# Altium PCB HUB_1P4.pcbdoc (part 1 of 2)
Units mil, origin at the board's own origin, x right, y up, seen from the top; angles counter-clockwise.
Board outline 4467.48 x 3480.02 mil, 2 copper layers (Top Layer, Bottom Layer); 207 components, 150 nets, 727 pads, 383 vias.
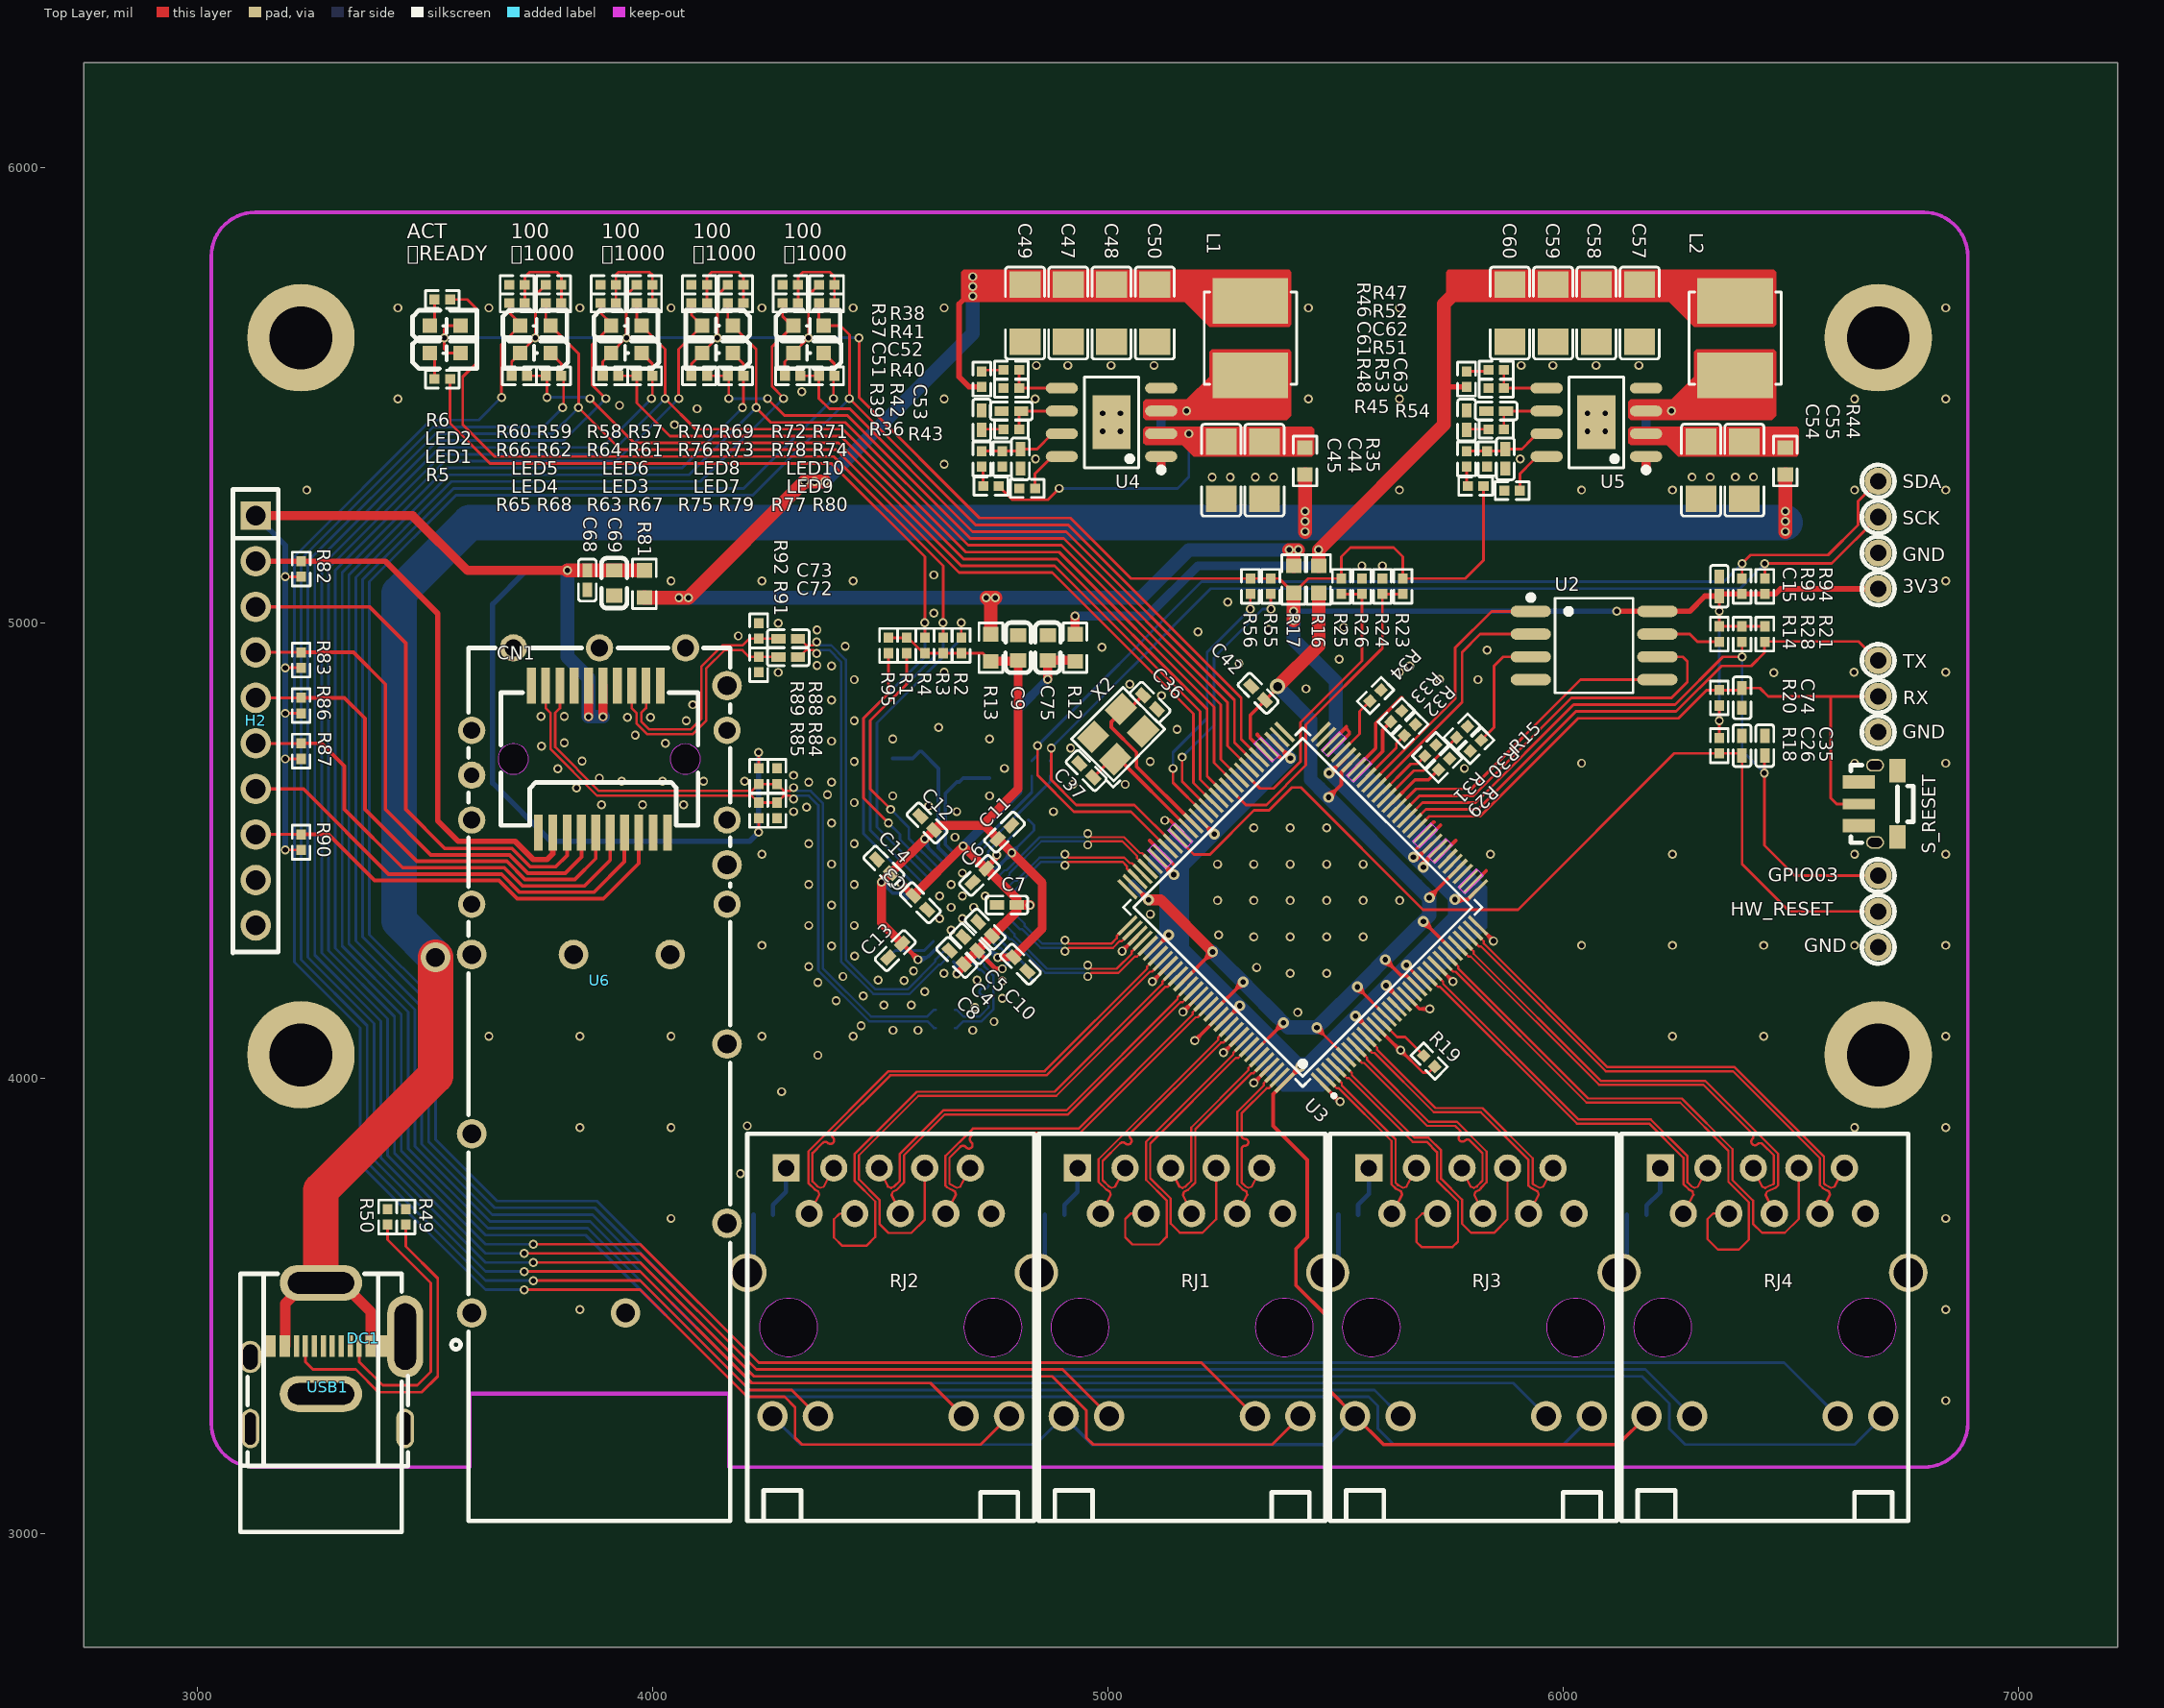
[diagram p0: Top Layer view]
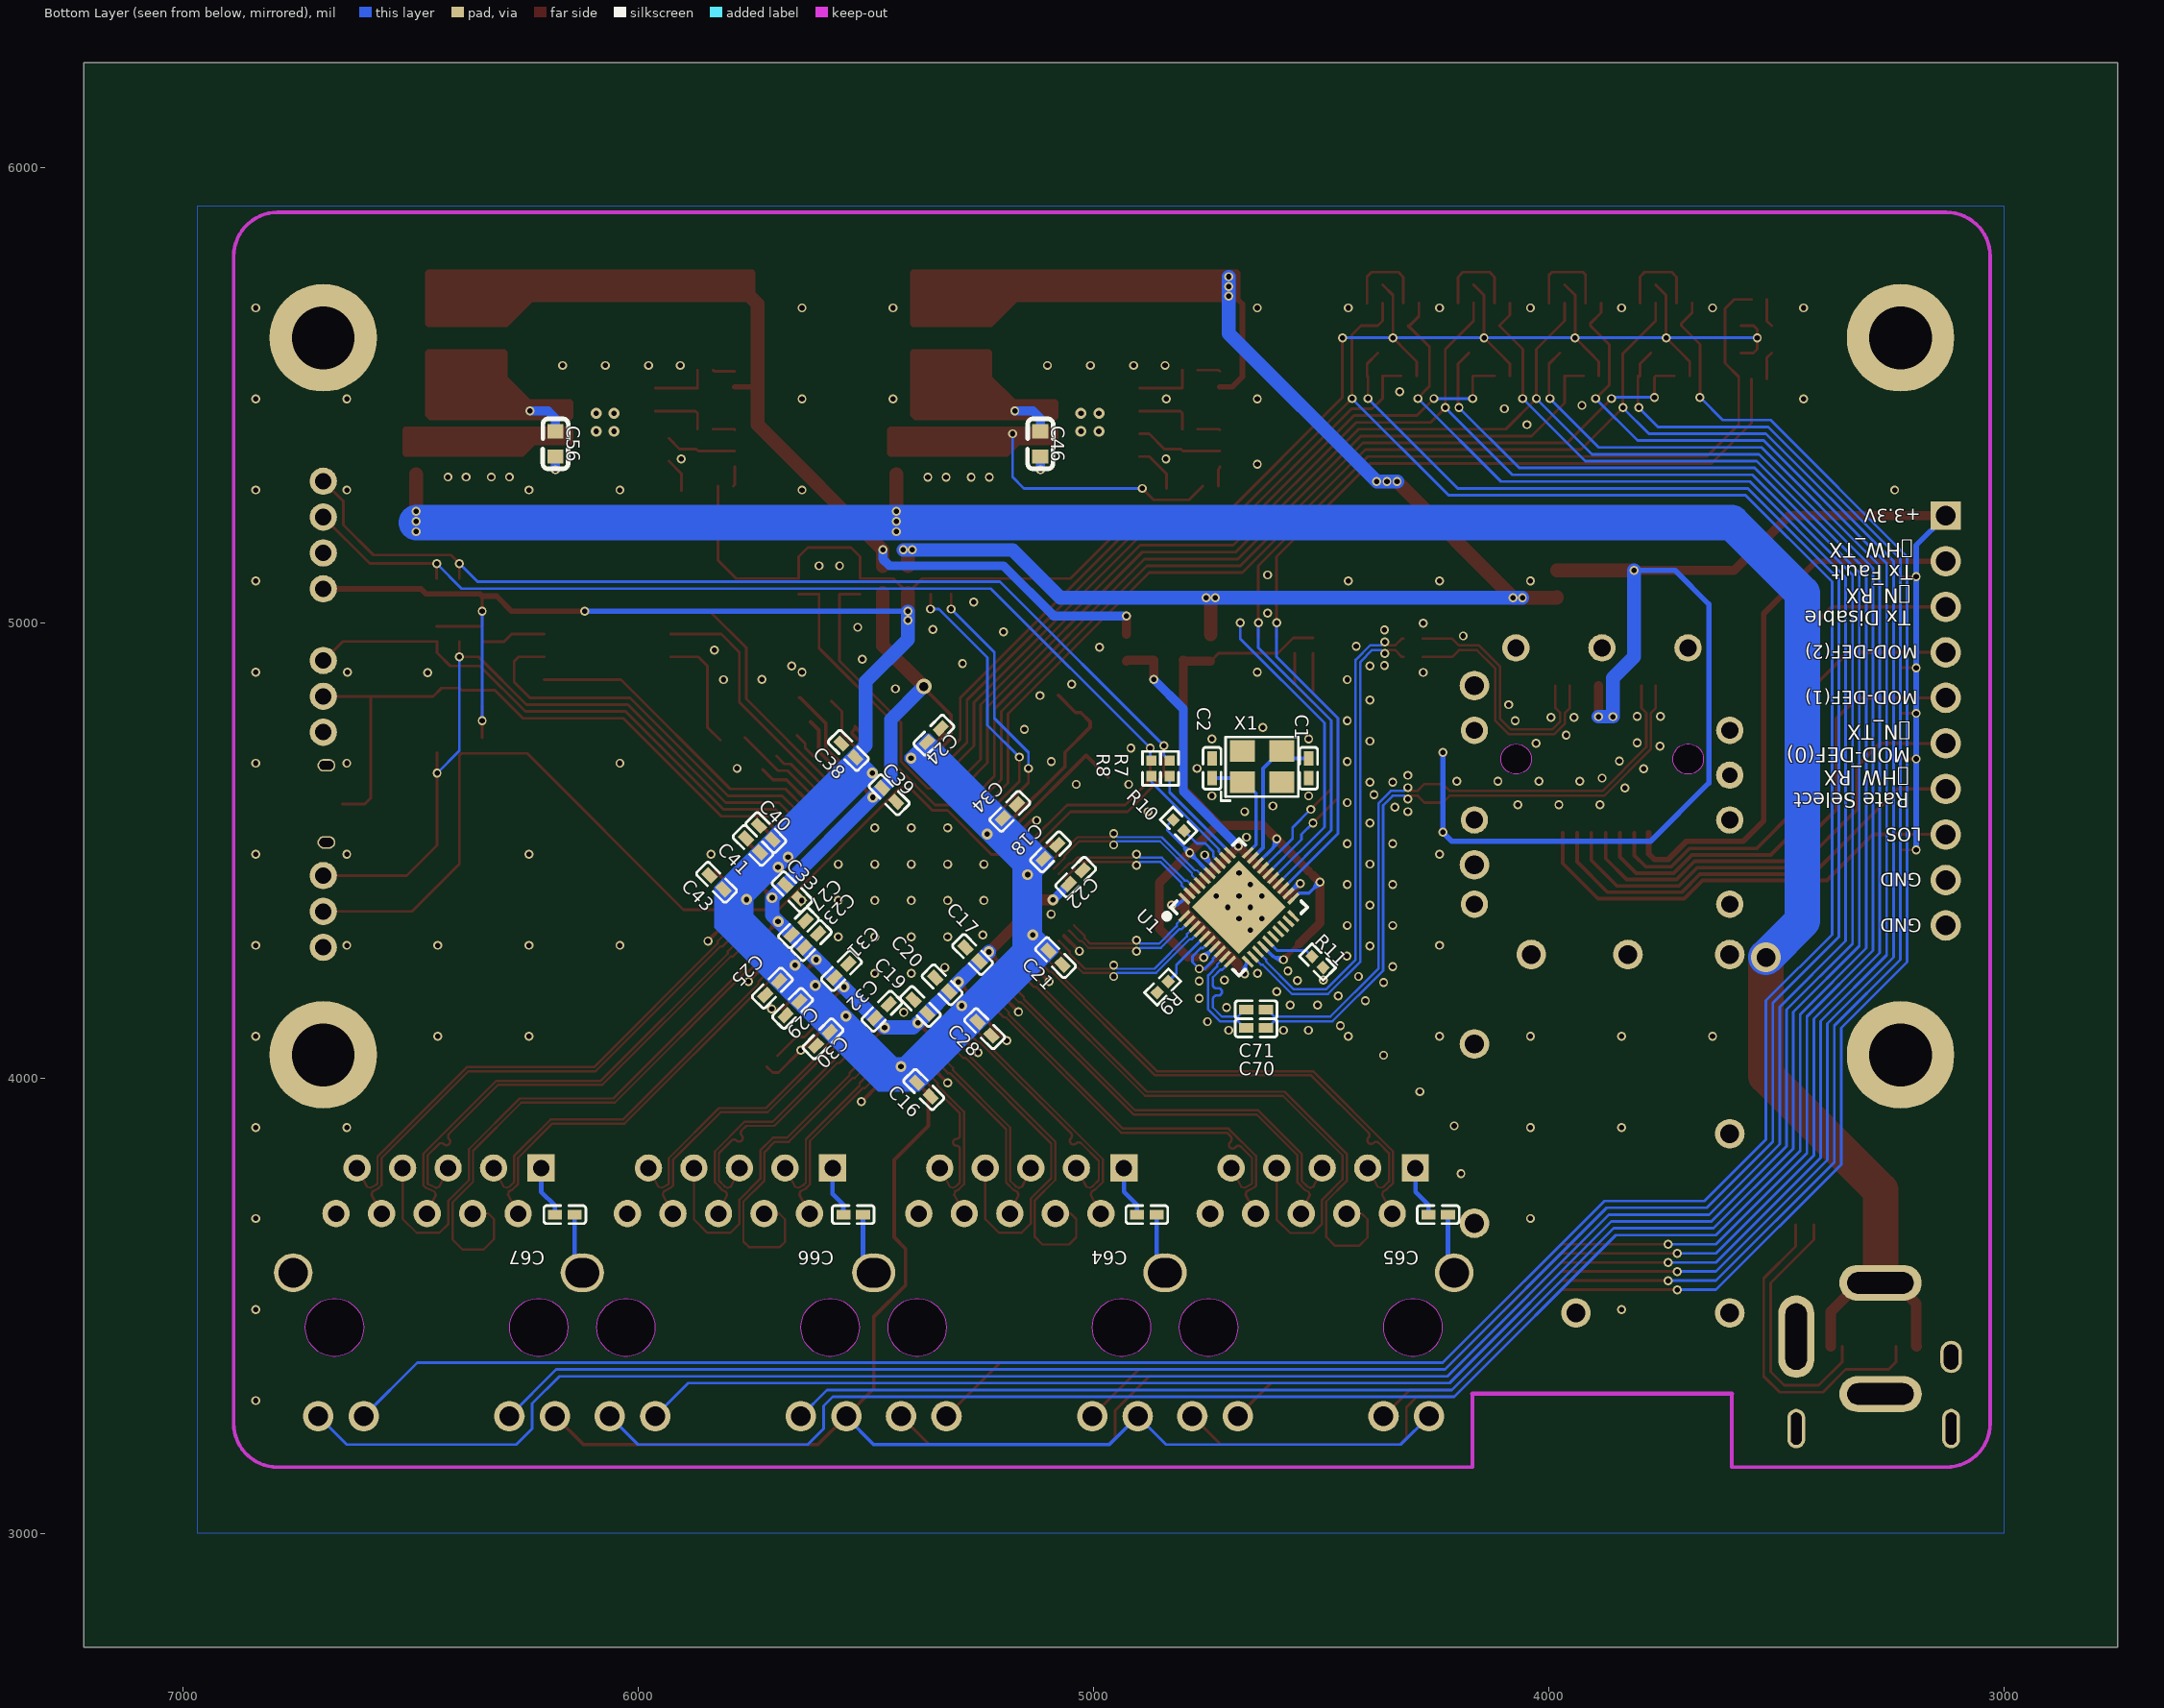
[diagram p1: Bottom Layer view, seen from below]

## Layer stack, top to bottom
Top Layer: signal copper (thickness not stored)
Dielectric: dielectric 12.6, FR-4, Dk 4.8
Bottom Layer: signal copper (thickness not stored)

## Board outline
7217.48,2750 2750,2750 2750,6230.02 7217.48,6230.02

## Components (designator, comment, footprint, x,y, rotation, side; value= is the part's Value field where it differs from the comment)
3V3 "测试点" TP-1.5MM 6691.42,5074.55 r0 top
C1 "0402CG180J500NT" C0402 4527.05,4680.3 r270 bottom
C2 "0402CG180J500NT" C0402 4739.19,4680.3 r270 bottom
C3 "CL05B104KO5NNNC" C0402_NEW 4587.44,4385.02 r135 top
C4 "CL05B104KO5NNNC" C0402_NEW 4697.44,4295.02 r315 top
C5 "CL05B104KO5NNNC" C0402_NEW 4729.8,4327.37 r315 top
C6 "CL05B104KO5NNNC" C0402_NEW 4717.44,4445.02 r45 top
C7 "CL05B104KO5NNNC" C0402_NEW 4777.44,4380.02 r0 top
C8 "CL05B104KO5NNNC" C0402_NEW 4667.44,4265.02 r315 top
C9 "CL10A106MA8NRNC" C0603 4802.44,4945.02 r270 top
C10 "CL05B104KO5NNNC" C0402_NEW 4807.44,4250.02 r135 top
C11 "CL05B104KO5NNNC" C0402_NEW 4772.44,4540.02 r225 top
C12 "CL05B104KO5NNNC" C0402_NEW 4602.44,4560.02 r315 top
C13 "CL05B104KO5NNNC" C0402_NEW 4532.44,4280.02 r45 top
C14 "CL05B104KO5NNNC" C0402_NEW 4507.44,4465.02 r315 top
C15 "CL05B104KO5NNNC" C0402_NEW 6342.44,5080.02 r270 top
C16 "CL05B104KO5NNNC" C0402_NEW 5372.46,3974.83 r225 bottom
C17 "CL05B104KO5NNNC" C0402_NEW 5265.32,4271.49 r45 bottom
C18 "CL05B104KO5NNNC" C0402_NEW 5094.11,4496.83 r135 bottom
C19 "CL05B104KO5NNNC" C0402_NEW 5379.79,4157.02 r45 bottom
C20 "CL05B104KO5NNNC" C0402_NEW 5331.9,4204.91 r45 bottom
C21 "CL05B104KO5NNNC" C0402_NEW 5082.94,4264.39 r225 bottom
C22 "CL05B104KO5NNNC" C0402_NEW 5038.63,4441 r315 bottom
C23 "CL05B104KO5NNNC" C0402_NEW 5619.44,4302.02 r315 bottom
C24 "CL05B104KO5NNNC" C0402_NEW 5350.22,4752.98 r315 bottom
C25 "CL05B104KO5NNNC" C0402_NEW 5705.17,4197.56 r135 bottom
C26 "CL05B104KO5NNNC" C0402_NEW 6392.44,4730.02 r270 top
C27 "CL05B104KO5NNNC" C0402_NEW 5647.44,4330.02 r315 bottom
C28 "CL05B104KO5NNNC" C0402_NEW 5238.85,4108.47 r225 bottom
C29 "CL05B104KO5NNNC" C0402_NEW 5660.66,4153.02 r135 bottom
C30 "CL05B104KO5NNNC" C0402_NEW 5593.83,4086.19 r135 bottom
C31 "CL05B104KO5NNNC" C0402_NEW 5553.26,4235.83 r315 bottom
C32 "CL05B104KO5NNNC" C0402_NEW 5464.33,4146.91 r315 bottom
C33 "CL05B104KO5NNNC" C0402_NEW 5661.44,4409.02 r225 bottom
C34 "CL05B104KO5NNNC" C0402_NEW 5183.2,4585.92 r135 bottom
C35 "CL05B104KO5NNNC" C0402_NEW 6442.44,4730.02 r270 top
C36 "0402CG200J500NT" C0402 5092.06,4825.41 r315 top
C37 "0402CG200J500NT" C0402 4952.06,4675.41 r315 top
C38 "CL05B104KO5NNNC" C0402_NEW 5538.11,4719.56 r225 bottom
C39 "CL05B104KO5NNNC" C0402_NEW 5448.44,4622.02 r45 bottom
C40 "CL05B104KO5NNNC" C0402_NEW 5719.44,4539.02 r225 bottom
C41 "CL05B104KO5NNNC" C0402_NEW 5747.44,4511.02 r225 bottom
C42 "CL05B104KO5NNNC" C0402_NEW 5329.44,4845.02 r315 top
C43 "CL05B104KO5NNNC" C0402_NEW 5827.66,4429.99 r225 bottom
C44 "CL31A476MPHNNNE" C1206 5343.4,5334.97 r90 top
C45 "CL31A476MPHNNNE" C1206 5248.4,5334.97 r90 top
C46 "CC0603KRX7R9BB104" C0603 5116.44,5392.58 r270 bottom
C47 "CL31A476MPHNNNE" C1206 4912.44,5680.02 r270 top
C48 "CL31A476MPHNNNE" C1206 5007.44,5679.97 r270 top
C49 "CL31A476MPHNNNE" C1206 4817.44,5680.02 r270 top
C50 "CL31A476MPHNNNE" C1206 5102.44,5680.02 r270 top
C51 "CL05B332KB5NNNC" C0402 4722.44,5445.02 r270 top
C52 "CL05C680JB5NNNC" C0402 4787.44,5465.02 r0 top
C53 "CL05B104KO5NNNC" C0402_NEW 4807.44,5360.02 r90 top
C54 "CL31A476MPHNNNE" C1206 6302.44,5335.02 r90 top
C55 "CL31A476MPHNNNE" C1206 6397.44,5335.02 r90 top
C56 "CC0603KRX7R9BB104" C0603 6181.44,5392.58 r270 bottom
C57 "CL31A476MPHNNNE" C1206 6167.44,5680.02 r270 top
C58 "CL31A476MPHNNNE" C1206 6072.44,5680.02 r270 top
C59 "CL31A476MPHNNNE" C1206 5977.44,5680.02 r270 top
C60 "CL31A476MPHNNNE" C1206 5882.44,5680.02 r270 top
C61 "0402B102K500NT" C0402 5787.44,5445.02 r270 top
C62 "0402B151K500NT" C0402 5852.44,5465.02 r0 top
C63 "CL05B104KO5NNNC" C0402_NEW 5872.44,5360.02 r90 top
C64 "CL05B104KB54PNC" C0402 4882.44,3700.02 r0 bottom
C65 "CL05B104KB54PNC" C0402 4242.44,3700.02 r0 bottom
C66 "CL05B104KB54PNC" C0402 5527.44,3700.02 r0 bottom
C67 "CL05B104KB54PNC" C0402 6160.94,3700.02 r0 bottom
C68 "CL05B104KO5NNNC" C0402_NEW 3856.07,5093.56 r90 top
C69 "CL10A105KB8NNNC" C0603 3915.21,5087.46 r90 top
C70 "CL05B104KO5NNNC" C0402_NEW 4642.44,4110.02 r0 bottom
C71 "CL05B104KO5NNNC" C0402_NEW 4642.44,4150.02 r0 bottom
C72 "CL05B104KO5NNNC" C0402_NEW 4297.44,4925.02 r0 top
C73 "CL05B104KO5NNNC" C0402_NEW 4297.44,4965.02 r0 top
C74 "CL05B104KO5NNNC" C0402_NEW 6392.44,4835.02 r90 top
C75 "CL10A106MA8NRNC" C0603 4867.44,4945.02 r270 top
CN1 "1367073-1" SFP-SMD_1367073-1 3882.48,4700.64 r0 top
DC1 "DC-005_2.5" DC-IN-TH_DC005 3363.48,3428.17 r90 top
GND "测试点" TP-1.5MM 6691.42,5153.29 r0 top
GND "测试点" TP-1.5MM 6691.42,4287.15 r0 top
GND "测试点" TP-1.5MM 6691.42,4759.59 r0 top
GPIO03 "测试点" TP-1.5MM 6691.42,4444.63 r0 top
H2 "HDR-F_2.54_1x10P" HDR-TH_10P-P2.54-V-F 3127.44,4785.02 r270 top
HW_RESET "测试点" TP-1.5MM 6691.42,4365.89 r0 top
L1 "VLS5045EX-220M" IND-SMD_L5.0-W5.0_LVS505040 5312.44,5625.02 r90 top
L2 "VLS5045EX-220M" IND-SMD_L5.0-W5.0_LVS505040 6377.44,5625.02 r90 top
LED1 "19-213/Y2C-CQ2R2L/3T(CY)" LED0603-R-RD 3543.78,5592.26 r0 top
LED2 "19-217/GHC-YR1S2/3T" LED0603-R-RD 3543.78,5652.26 r0 top
LED3 "19-213/Y2C-CQ2R2L/3T(CY)" LED0603-R-RD 3941.81,5592.26 r180 top
LED4 "19-213/Y2C-CQ2R2L/3T(CY)" LED0603-R-RD 3741.81,5592.26 r180 top
LED5 "19-217/GHC-YR1S2/3T" LED0603-R-RD 3741.81,5652.26 r0 top
LED6 "19-217/GHC-YR1S2/3T" LED0603-R-RD 3941.81,5652.26 r0 top
LED7 "19-213/Y2C-CQ2R2L/3T(CY)" LED0603-R-RD 4141.81,5592.26 r180 top
LED8 "19-217/GHC-YR1S2/3T" LED0603-R-RD 4141.81,5652.26 r180 top
LED9 "19-213/Y2C-CQ2R2L/3T(CY)" LED0603-R-RD 4341.81,5592.26 r180 top
LED10 "19-217/GHC-YR1S2/3T" LED0603-R-RD 4341.81,5652.26 r0 top
R1 "0402WGF4701TCE" R0402 4557.44,4950.02 r90 top
R2 "0402WGF4701TCE" R0402 4677.44,4950.02 r90 top
R3 "0402WGF4701TCE" R0402 4637.44,4950.02 r270 top
R4 "0402WGF4701TCE" R0402 4597.44,4950.02 r270 top
R5 "0402WGF4700TCE" R0402 3537.44,5535.02 r180 top
R6 "0402WGF4700TCE" R0402 3537.44,5710.02 r180 top
R7 "Res_0402" R0402 4832.44,4680.02 r90 bottom
R8 "Res_0402" R0402 4872.44,4680.02 r90 bottom
R9 "RC0402FR-072K49L" R0402 4847.44,4200.02 r135 bottom
R10 "0402WGF4701TCE" R0402 4812.44,4555.02 r45 bottom
R11 "0402WGF4701TCE" R0402 4507.44,4255.02 r45 bottom
R12 "0603WAF0000T5E" R0603 4927.44,4945.02 r270 top
R13 "0603WAF0000T5E" R0603 4742.44,4945.02 r270 top
R14 "0402WGF4701TCE" R0402 6342.44,4975.02 r90 top
R15 "0402WGF1001TCE" R0402 5807.44,4730.02 r45 top
R16 "0603WAF0000T5E" R0603 5462.44,5095.02 r270 top
R17 "0603WAF0000T5E" R0603 5407.44,5095.02 r270 top
R18 "0402WGF4701TCE" R0402 6342.44,4730.02 r90 top
R19 "RC0402FR-072K49L" R0402 5705.44,4037.02 r135 top
R20 "0402WGF4701TCE" R0402 6342.44,4835.02 r270 top
R21 "0402WGF4701TCE" R0402 6442.44,4975.02 r270 top
R23 "0402WGF4701TCE" R0402 5647.44,5080.02 r90 top
R24 "tr0402d10k0q1025z" R0402 5602.44,5080.02 r90 top
R25 "0402WGF4701TCE" R0402 5512.44,5080.02 r90 top
R26 "tr0402d10k0q1025z" R0402 5557.44,5080.02 r90 top
R28 "0402WGF4701TCE" R0402 6392.44,4975.02 r90 top
R29 "0402WGF1001TCE" R0402 5737.94,4689.39 r225 top
R30 "0402WGF1001TCE" R0402 5777.44,4760.02 r225 top
R31 "0402WGF1001TCE" R0402 5707.94,4719.39 r225 top
R32 "0402WGF1001TCE" R0402 5662.94,4764.39 r225 top
R33 "0402WGF1001TCE" R0402 5632.94,4794.39 r225 top
R34 "0402WGF1001TCE" R0402 5587.44,4840.02 r225 top
R35 "0603WAF0000T5E" R0603 5432.44,5355.02 r90 top
R36 "0402WGF1002TCE" R0402 4742.44,5300.02 r180 top
R37 "0402WGF2702TCE" R0402 4722.44,5535.02 r90 top
R38 "0402WGF1503TCE" R0402 4787.44,5555.02 r180 top
R39 "0402WGF1002TCE" R0402 4722.44,5360.02 r270 top
R40 "0402WGF1002TCE" R0402 4787.44,5425.02 r0 top
R41 "0402WGF5602TCE" R0402 4787.44,5515.02 r0 top
R42 "0402WGF1002TCE" R0402 4767.44,5360.02 r90 top
R43 "0402WGF1003TCE" R0402 4822.44,5295.02 r180 top
R44 "0603WAF0000T5E" R0603 6487.44,5355.02 r90 top
R45 "0402WGF0000TCE" R0402 5807.44,5300.02 r180 top
R46 "0402WGF3302TCE" R0402 5787.44,5535.02 r90 top
R47 "0402WGF5101TCE" R0402 5852.44,5555.02 r180 top
R48 "0402WGF220JTCE" R0402 5787.44,5360.02 r270 top
R49 "0402WGF5101TCE" R0402 3457.44,3695.02 r270 top
R50 "0402WGF5101TCE" R0402 3417.44,3695.02 r270 top
R51 "0402WGF1002TCE" R0402 5852.44,5425.02 r0 top
R52 "0402WGF1003TCE" R0402 5852.44,5515.02 r0 top
R53 "0402WGF1002TCE" R0402 5832.44,5360.02 r90 top
R54 "0402WGF1503TCE" R0402 5887.44,5290.02 r180 top
R55 "0402WGF4701TCE" R0402 5357.44,5080.02 r270 top
R56 "0402WGF4701TCE" R0402 5312.44,5080.02 r270 top
R57 "0402WGF0000TCE" R0402 3981.81,5742.26 r0 top
R58 "0402WGF0000TCE" R0402 3901.81,5742.26 r0 top
R59 "0402WGF0000TCE" R0402 3781.81,5742.26 r0 top
R60 "0402WGF0000TCE" R0402 3701.81,5742.26 r0 top
R61 "0402WGF4701TCE" R0402 3981.81,5702.26 r180 top
R62 "0402WGF4701TCE" R0402 3781.81,5702.26 r180 top
R63 "0402WGF4701TCE" R0402 3906.81,5542.26 r0 top
R64 "0402WGF4700TCE" R0402 3901.81,5702.26 r180 top
R65 "0402WGF4701TCE" R0402 3706.81,5542.26 r0 top
R66 "0402WGF4700TCE" R0402 3701.81,5702.26 r180 top
R67 "0402WGF4700TCE" R0402 3981.81,5542.26 r180 top
R68 "0402WGF4700TCE" R0402 3781.81,5542.26 r180 top
R69 "0402WGF0000TCE" R0402 4181.81,5742.26 r0 top
R70 "0402WGF0000TCE" R0402 4101.81,5742.26 r0 top
R71 "0402WGF0000TCE" R0402 4381.81,5742.26 r0 top
R72 "0402WGF0000TCE" R0402 4301.81,5742.26 r0 top
R73 "0402WGF4701TCE" R0402 4181.81,5702.26 r180 top
R74 "0402WGF4701TCE" R0402 4381.81,5702.26 r180 top
R75 "0402WGF4701TCE" R0402 4101.81,5542.26 r0 top
R76 "0402WGF4700TCE" R0402 4101.81,5702.26 r180 top
R77 "0402WGF4701TCE" R0402 4306.81,5542.26 r0 top
R78 "0402WGF4700TCE" R0402 4301.81,5702.26 r180 top
R79 "0402WGF4700TCE" R0402 4181.81,5542.26 r180 top
R80 "0402WGF4700TCE" R0402 4381.81,5542.26 r180 top
R81 "0603WAF0000T5E" R0603 3981.38,5085.36 r90 top
R82 "0402WGF1002TCE" R0402 3227.44,5118.02 r270 top
R83 "0402WGF1002TCE" R0402 3227.4,4917.98 r270 top
R84 "Res_0402" R0402 4272.5,4587.91 r90 top
R85 "Res_0402" R0402 4232.5,4587.91 r270 top
R86 "0402WGF1002TCE" R0402 3227.4,4817.98 r270 top
R87 "0402WGF1002TCE" R0402 3227.4,4717.98 r270 top
R88 "Res_0402" R0402 4272.5,4662.91 r270 top
R89 "Res_0402" R0402 4232.5,4662.91 r90 top
R90 "0402WGF1002TCE" R0402 3227.4,4517.98 r270 top
R91 "Res_0402" R0402 4232.44,4908.02 r90 top
R92 "Res_0402" R0402 4232.44,4982.02 r270 top
R93 "0402WGF4701TCE" R0402 6392.44,5080.02 r270 top
R94 "0402WGF4701TCE" R0402 6442.44,5080.02 r270 top
R95 "0402WGF4701TCE" R0402 4517.44,4950.02 r90 top
RJ1 "hr911130a" rj45-th_hr911130a 5162.48,3530.02 r180 top
RJ2 "hr911130a" rj45-th_hr911130a 4522.48,3530.02 r180 top
RJ3 "hr911130a" rj45-th_hr911130a 5802.48,3530.02 r180 top
RJ4 "hr911130a" rj45-th_hr911130a 6442.48,3530.02 r180 top
RX "测试点" TP-1.5MM 6691.42,4838.33 r270 top
S_RESET "st-1133" key-smd_st-1133 6691.42,4602.11 r90 top
SCK "测试点" TP-1.5MM 6691.42,5232.03 r0 top
SDA "测试点" TP-1.5MM 6691.42,5310.77 r0 top
TX "测试点" TP-1.5MM 6691.42,4917.07 r90 top
U1 "RTL8213B-CG" QFN-40_L5.0-W5.0-P0.40-BL-EP3.7 4680,4375.02 r225 bottom
U2 "w25q32jvssiq" soic-8_l5.3-w5.3-p1.27-ls8.0-bl 6067.44,4950.02 r270 top
U3 "RTL8367S-CG" lqfp-128_l14.0-w14.0-p0.40-ls16.0-bl 5427.44,4375.02 r45 top
U4 "TPS54335ADDAR" SOP-8_L4.9-W3.9-P1.27-LS6.0-BL-EP-1 5007.44,5440.02 r90 top
U5 "TPS54335ADDAR" SOP-8_L4.9-W3.9-P1.27-LS6.0-BL-EP-1 6072.44,5440.02 r90 top
U6 "HC-SFP-01L" TH_HC-SFP-01L 3882.48,4214.41 r90 top
USB1 "TYPE-C-31-M-08B" USB-C-SMD_TYPE-C-31-M-08B 3285.91,3320.64 r0 top
X1 "X322525MOB4SI" OSC-SMD_4P-L3.2-W2.5-BL 4629.59,4683.84 r180 bottom
X2 "X322525MOB4SI" OSC-SMD_4P-L3.2-W2.5-BL 5022.06,4755.41 r45 top

## Footprints (in the part's own frame and the unit in brackets; to place one, negate y for a bottom-side part, rotate by r counter-clockwise, add the part's x,y. Pads: shape width x height; smd on the part's side, far side on the other; paste and mask are expansions set on the pad)
C0402 [mm]
  rect 0.79x0.54 smd: 1(-0.545,0) 2(0.545,0)
  silkscreen extent -1.17,-0.5 1.17,0.5
C0402_NEW [mm]
  rect 0.79x0.54 smd: 1(-0.545,0) 2(0.545,0)
  silkscreen extent -1.17,-0.5 1.17,0.5
C0603 [mm]
  rect 0.8x0.9 smd: 1(-0.7,0) 2(0.7,0)
  silkscreen extent -1.41,-0.71 1.39,0.72
C1206 [mm]
  rect 1.485x1.728 smd: 1(-1.593,0) 2(1.593,0)
  silkscreen extent -2.56,-1.09 2.56,1.09
DC-IN-TH_DC005 [mm]
  oval 2x4.6 hole 1.2 slot 3.7 at 90 deg: 1(3.1,2.35) 2(-3.1,2.35)
  oval 4.6x2 hole 1.2 slot 3.7 at 0 deg: 3(0.1,-2.35)
  silkscreen extent -10.8,-2.15 3.6,6.85
HDR-TH_10P-P2.54-V-F [mil]
  rect 62x66.9 hole 43.3: 1(-450,0)
  round 66.9 hole 43.3: 2(-350,0) 3(-250,0) 4(-150,0) 5(-50,0) 6(50,0) 7(150,0) 8(250,0) 9(350,0) 10(450,0)
  silkscreen extent -508,-50 510,50
IND-SMD_L5.0-W5.0_LVS505040 [mil]
  rect 99.4x166.1 smd: 1(81.8,0) 2(-81.8,0)
  silkscreen extent -101,-101 101,101
key-smd_st-1133 [mil]
  oval 27.6x39.4 hole 19.7 slot 31.5 at 90 deg: 1(-84.6,6.9) 3(84.7,6.9)
  rect 51.2x35.4 smd: 1(-72.8,-42.3) 3(72.8,-42.3)
  rect 29.5x70.9 smd: 1(-48.2,42.3) 3(48.2,42.3)
  rect 23.6x70.9 smd: 2(0,42.3)
  silkscreen extent -85,-77 85,60
LED0603-R-RD [mm]
  rect 0.8x0.8 smd: 1(0.851,0) 2(-0.851,0)
  silkscreen extent -1.82,-0.86 1.77,0.86
lqfp-128_l14.0-w14.0-p0.40-ls16.0-bl [mil]
  rect 7.9x57.5 smd: 1(-244.1,-300.4) 2(-228.3,-300.4) 3(-212.6,-300.4) 4(-196.8,-300.4) 5(-181.1,-300.4) 6(-165.3,-300.4) 7(-149.6,-300.4) 8(-133.9,-300.4) 9(-118.1,-300.4) 10(-102.4,-300.4) 11(-86.6,-300.4) 12(-70.9,-300.4) 13(-55.1,-300.4) 14(-39.4,-300.4) 15(-23.6,-300.4) 16(-7.9,-300.4) 17(7.9,-300.4) 18(23.6,-300.4) 19(39.4,-300.4) 20(55.1,-300.4) 21(70.9,-300.4) 22(86.6,-300.4) 23(102.4,-300.4) 24(118.1,-300.4) 25(133.9,-300.4) 26(149.6,-300.4) 27(165.4,-300.4) 28(181.1,-300.4) 29(196.9,-300.4) 30(212.6,-300.4) 31(228.4,-300.4) 32(244.1,-300.4) 65(244.1,300.4) 66(228.4,300.4) 67(212.6,300.4) 68(196.9,300.4) 69(181.1,300.4) 70(165.4,300.4) 71(149.6,300.4) 72(133.9,300.4) 73(118.1,300.4) 74(102.4,300.4) 75(86.6,300.4) 76(70.9,300.4) 77(55.1,300.4) 78(39.4,300.4) 79(23.6,300.4) 80(7.9,300.4) 81(-7.9,300.4) 82(-23.6,300.4) 83(-39.4,300.4) 84(-55.1,300.4) 85(-70.9,300.4) 86(-86.6,300.4) 87(-102.4,300.4) 88(-118.1,300.4) 89(-133.9,300.4) 90(-149.6,300.4) 91(-165.3,300.4) 92(-181.1,300.4) 93(-196.8,300.4) 94(-212.6,300.4) 95(-228.3,300.4) 96(-244.1,300.4)
  rect 57.5x7.9 smd: 33(300.4,-244.1) 34(300.4,-228.3) 35(300.4,-212.6) 36(300.4,-196.8) 37(300.4,-181.1) 38(300.4,-165.3) 39(300.4,-149.6) 40(300.4,-133.9) 41(300.4,-118.1) 42(300.4,-102.4) 43(300.4,-86.6) 44(300.4,-70.9) 45(300.4,-55.1) 46(300.4,-39.4) 47(300.4,-23.6) 48(300.4,-7.9) 49(300.4,7.9) 50(300.4,23.6) 51(300.4,39.4) 52(300.4,55.1) 53(300.4,70.9) 54(300.4,86.6) 55(300.4,102.4) 56(300.4,118.1) 57(300.4,133.9) 58(300.4,149.6) 59(300.4,165.4) 60(300.4,181.1) 61(300.4,196.9) 62(300.4,212.6) 63(300.4,228.4) 64(300.4,244.1) 97(-300.4,244.1) 98(-300.4,228.4) 99(-300.4,212.6) 100(-300.4,196.9) 101(-300.4,181.1) 102(-300.4,165.4) 103(-300.4,149.6) 104(-300.4,133.9) 105(-300.4,118.1) 106(-300.4,102.4) 107(-300.4,86.6) 108(-300.4,70.9) 109(-300.4,55.1) 110(-300.4,39.4) 111(-300.4,23.6) 112(-300.4,7.9) 113(-300.4,-7.9) 114(-300.4,-23.6) 115(-300.4,-39.4) 116(-300.4,-55.1) 117(-300.4,-70.9) 118(-300.4,-86.6) 119(-300.4,-102.4) 120(-300.4,-118.1) 121(-300.4,-133.9) 122(-300.4,-149.6) 123(-300.4,-165.3) 124(-300.4,-181.1) 125(-300.4,-196.8) 126(-300.4,-212.6) 127(-300.4,-228.3) 128(-300.4,-244.1)
  silkscreen extent -279,-345 279,279
OSC-SMD_4P-L3.2-W2.5-BL [mm]
  rect 1.4x1.2 smd: 1(-1.1,-0.875) 2(1.1,-0.875) 3(1.1,0.875) 4(-1.1,0.875)
  silkscreen extent -2.29,-1.9 2.03,1.65
QFN-40_L5.0-W5.0-P0.40-BL-EP3.7 [mm]
  rect 0.2x0.8 smd: 1(-1.8,-2.499) 2(-1.4,-2.499) 3(-1,-2.499) 4(-0.6,-2.499) 5(-0.2,-2.499) 6(0.2,-2.499) 7(0.6,-2.499) 8(1,-2.499) 9(1.4,-2.499) 10(1.8,-2.499) 21(1.8,2.499) 22(1.4,2.499) 23(1,2.499) 24(0.6,2.499) 25(0.2,2.499) 26(-0.2,2.499) 27(-0.6,2.499) 28(-1,2.499) 29(-1.4,2.499) 30(-1.8,2.499)
  rect 0.8x0.2 smd: 11(2.499,-1.8) 12(2.499,-1.4) 13(2.499,-1) 14(2.499,-0.6) 15(2.499,-0.2) 16(2.499,0.2) 17(2.499,0.6) 18(2.499,1) 19(2.499,1.4) 20(2.499,1.8) 31(-2.499,1.8) 32(-2.499,1.4) 33(-2.499,1) 34(-2.499,0.6) 35(-2.499,0.2) 36(-2.499,-0.2) 37(-2.499,-0.6) 38(-2.499,-1) 39(-2.499,-1.4) 40(-2.499,-1.8)
  rect 3.7x3.7 smd: 41(0,0)
  silkscreen extent -2.7,-3.35 2.7,2.7
R0402 [mm]
  rect 0.566x0.54 smd: 1(-0.433,0) 2(0.433,0)
  silkscreen extent -0.94,-0.5 0.94,0.5
R0603 [mil]
  rect 31.75x34.02 smd: 1(-29.66,0) 2(29.66,0)
  silkscreen extent -55,-26 55,26
rj45-th_hr911130a [mil]
  round 66.93 hole 43.31: 11(260,272.62) 12(160,272.62) 13(-160,272.62) 14(-260,272.62)
  rect 60x60 hole 35.83: P1(229.63,-272.62)
  round 60 hole 35.83: P2(179.1,-172.38) P3(125.2,-272.38) P4(79.1,-172.38) P5(25.2,-272.38) P6(-20.9,-172.38) P7(-74.8,-272.38) P8(-120.9,-172.38) P9(-174.8,-272.38) P10(-220.9,-172.38)
  round 85 hole 65: SHIELD0(-315,-42.48) SHIELD1(315,-42.48)
  Multi-Layer board cut-out: -288.38,77.62 -282.04,49.86 -264.29,27.6 -238.63,15.25 -210.16,15.25 -184.51,27.6 -166.76,49.86 -160.42,77.62 -160.42,77.62 -166.76,105.38 -184.51,127.64 -210.16,139.99 -238.63,139.99 -264.29,127.64 -282.04,105.38 -288.38,77.62
  Multi-Layer board cut-out: 160.42,77.62 166.76,49.86 184.51,27.6 210.17,15.25 238.64,15.25 264.29,27.6 282.04,49.86 288.38,77.62 288.38,77.62 282.04,105.38 264.29,127.64 238.64,139.99 210.17,139.99 184.51,127.64 166.76,105.38 160.42,77.62
  Multi-Layer keep-out region: -288.38,77.62 -282.04,49.86 -264.29,27.6 -238.63,15.25 -210.16,15.25 -184.51,27.6 -166.76,49.86 -160.42,77.62 -160.42,77.62 -166.76,105.38 -184.51,127.64 -210.16,139.99 -238.63,139.99 -264.29,127.64 -282.04,105.38 -288.38,77.62
  Multi-Layer keep-out region: 160.42,77.62 166.76,49.86 184.51,27.6 210.17,15.25 238.64,15.25 264.29,27.6 282.04,49.86 288.38,77.62 288.38,77.62 282.04,105.38 264.29,127.64 238.64,139.99 210.17,139.99 184.51,127.64 166.76,105.38 160.42,77.62
  silkscreen extent -315,-347 315,503
SFP-SMD_1367073-1 [mm]
  rect 0.5x2 smd: 1(-3.4,-4.1) 2(-2.6,-4.1) 3(-1.8,-4.1) 4(-1,-4.1) 5(-0.2,-4.1) 6(0.6,-4.1) 7(1.4,-4.1) 8(2.2,-4.1) 9(3,-4.1) 10(3.8,-4.1) 11(3.4,4.1) 12(2.6,4.1) 13(1.8,4.1) 14(1,4.1) 15(0.2,4.1) 16(-0.6,4.1) 17(-1.4,4.1) 18(-2.2,4.1) 19(-3,4.1) 20(-3.8,4.1)
  Multi-Layer board cut-out: -3.949,0 -4.033,0.369 -4.269,0.665 -4.611,0.83 -4.989,0.83 -5.331,0.665 -5.567,0.369 -5.651,0 -5.651,0 -5.567,-0.369 -5.331,-0.665 -4.989,-0.83 -4.611,-0.83 -4.27,-0.665 -4.033,-0.369 -3.949,0
  Multi-Layer board cut-out: 5.651,0 5.534,0.422 5.223,0.73 4.8,0.843 4.377,0.73 4.066,0.422 3.949,0 3.949,0 4.066,-0.422 4.377,-0.73 4.8,-0.843 5.223,-0.73 5.534,-0.422 5.651,0
  Multi-Layer keep-out region: -3.949,0 -4.033,0.369 -4.269,0.665 -4.611,0.83 -4.989,0.83 -5.331,0.665 -5.567,0.369 -5.651,0 -5.651,0 -5.567,-0.369 -5.331,-0.665 -4.989,-0.83 -4.611,-0.83 -4.27,-0.665 -4.033,-0.369 -3.949,0
  Multi-Layer keep-out region: 5.651,0 5.534,0.422 5.223,0.73 4.8,0.843 4.377,0.73 4.066,0.422 3.949,0 3.949,0 4.066,-0.422 4.377,-0.73 4.8,-0.843 5.223,-0.73 5.534,-0.422 5.651,0
  silkscreen extent -5.5,-3.7 5.5,3.7
soic-8_l5.3-w5.3-p1.27-ls8.0-bl [mm]
  oval 0.63x2.25 smd: 1(-1.905,-3.53) 2(-0.635,-3.53) 3(0.635,-3.53) 4(1.905,-3.53) 5(1.905,3.53) 6(0.635,3.53) 7(-0.635,3.53) 8(-1.905,3.53)
  silkscreen extent -2.82,-3.68 2.64,2.18
SOP-8_L4.9-W3.9-P1.27-LS6.0-BL-EP-1 [mm]
  oval 0.6x1.8 smd: 1(-1.905,-2.772) 2(-0.635,-2.772) 3(0.635,-2.772) 4(1.905,-2.772) 5(1.905,2.772) 6(0.635,2.772) 7(-0.635,2.772) 8(-1.905,2.772)
  rect 3x2.13 smd: 9(0,0)
  silkscreen extent -2.8,-2.92 2.53,1.52
TH_HC-SFP-01L [mm]
  round 1.65 hole 1.05: 1(-18.55,7.125) 2(-8.55,7.125) 3(1.45,7.125) 11(16.45,-7.125) 14(6.45,-7.125) 16(-3.55,-7.125) 17(-13.55,-7.125) 18(-18.55,-1.455) 19(1.45,-3.955) 20(1.45,1.445)
  round 1.524 hole 0.95: 4(4.25,7.125) 5(8.95,7.125) 7(13.95,7.125) 8(18.55,4.795) 9(18.55,-0.005) 10(18.55,-4.805) 12(13.95,-7.125) 13(8.95,-7.125) 15(4.25,-7.125)
  round 1.524 hole 0.85: 6(11.45,7.125)
  Board Outline Layer lines w0.254: -23.05,7.239 -23.05,-7.239 -23.05,7.239
  silkscreen extent -30.15,-7.3 18.55,8.25
TP-1.5MM [mm]
  round 1.5 smd: 1(0,0)
  silkscreen extent -0.91,-0.92 0.92,0.92
USB-C-SMD_TYPE-C-31-M-08B [mil]
  oval 39.4x86.6 hole 23.6 slot 70.9 at 90 deg: 1(-170.1,-90.6) 1(170.1,-90.6)
  oval 47.2x70.9 hole 31.5 slot 55.1 at 90 deg: 1(-170.1,66.9) 1(170.1,66.9)
  rect 23.6x47.2 smd: A1B12(-126,90.5) A4B9(-94.5,90.5) B1A12(126,90.5) B4A9(94.5,90.5)
  rect 11.8x47.2 smd: A5(-49.2,90.5) A6(-9.8,90.5) A7(9.8,90.5) A8(49.2,90.5) B5(68.9,90.5) B6(29.5,90.5) B7(-29.5,90.5) B8(-68.9,90.5)
  silkscreen extent -176,-173 176,25

## Free pads (board coordinates)
  round 60 hole 36: 1(6691.42,5310.77) 2(6691.42,5232.03) 3(6691.42,5153.29) 4(6691.42,5074.55) 5(6691.42,4917.07) 6(6691.42,4838.33) 7(6691.42,4759.59) 8(6691.42,4444.63) 9(6691.42,4365.89) 10(6691.42,4287.15)
  round 236.22 hole 137.8: 1(6691.42,5625.73) 2(3226.85,5625.73) 3(3226.85,4050.93) 4(6691.42,4050.93)

## Via types
v1: diameter 19.68, hole 11.81, Top Layer to Bottom Layer, 250 vias
v2: diameter 19.6, hole 11.8, Top Layer to Bottom Layer, 64 vias
v3: diameter 20, hole 12, Top Layer to Bottom Layer, 36 vias
v4: diameter 24.02, hole 12.01, Top Layer to Bottom Layer, 16 vias
v5: diameter 24, hole 12, Top Layer to Bottom Layer, 15 vias
v6: diameter 34, hole 20, Top Layer to Bottom Layer, 1 vias
v7: diameter 65, hole 41, Top Layer to Bottom Layer, 1 vias

## Nets (pads, with @x,y where several pads share a name; then routed paths per layer and width w, separated by ;. In a path a pad name is that pad's centre, name@x,y a point inside that pad or via, vN(x,y) a via of type N, cw(c..) or ccw(c..) an arc to the next point about the centre after c; other vN are vias at no path point)
1V1: C17.1 C19.1 C20.1 C22.2 C23.2 C27.2 C31.2 C32.2 C33.1 C39.2 C42.2 R16.2 U3.6 U3.14 U3.20 U3.27 U3.37 U3.58 U3.69 U3.95 U3.108 U3.114 U3.122 | length 2831.7
  Top Layer w6: v5(5458.44,4111.02) 5458.44,4110.25 U3.6@5522.97,4045.72 ; v5(5547.44,4200.02) 5547.44,4199.3 U3.14@5612,4134.74
  Top Layer w7.9: U3.95@5053.59,4426 v4(5088.46,4391.18) ; U3.108@5164.89,4212.74 5229.17,4277.02 v5(5229.44,4277.02) ; U3.114@5231.71,4145.92 5296.44,4210.64 v5(5296.44,4211.02) ; U3.122@5320.81,4056.82 5385.01,4121.02 v5(5385.44,4121.02) ; U3.69@5343.08,4715.49 5312.44,4746.13 5312.44,4797.02 5372.29,4856.87 v6(5372.29,4860) ; v4(5484.28,4616.53) 5512.1,4644.36 5512.1,4671.25 U3.58@5534.07,4693.22 ; v5(5608.44,4260.02) 5643.44,4225.02 5655.37,4225.02 U3.20@5678.82,4201.57 ; v5@5692.44,4343.93 U3.27@5756.81,4279.56 ; v4@5704.44,4396.02 5704.59,4396.02 U3.37@5767.91,4459.38
  Top Layer w24: v4(5088.46,4391.18) 5115.29,4391.18 v5(5229.44,4277.02)
  Top Layer w30: v6(5372.29,4860) 5462.44,4950.15 R16.2@5462.44,5065.36
  Bottom Layer w6: v5@5295.92,4210.55 v5(5296.44,4211.02) ; v5@5458.3,4110.53 v5@5458.3,4110.88 ; v5@5547.42,4199.65 v5(5547.44,4200.02) ; v5@5692.14,4344.32 v5(5692.44,4344.02)
  Bottom Layer w7.9: v5@5608.17,4260.4 5608.17,4260.29 v5(5608.44,4260.02)
  Bottom Layer w20: C22.2@5053.81,4425.83 v4(5088.46,4391.18)
  Bottom Layer w30: v6(5372.29,4860) 5445,4787.29 5445,4655.81 C39.2@5463.62,4637.19
  Bottom Layer w31.1: v5(5229.44,4277.02) C17.1@5250.15,4256.31 v5@5295.92,4210.55 ; v5@5295.94,4210.52 C20.1@5316.73,4189.73 C19.1@5364.62,4141.84 v5(5385.44,4121.02) 5395.44,4111.02 v5(5458.44,4111.02) ; v5@5458.3,4110.53 C32.2@5479.5,4131.73 5547.42,4199.65 C31.2@5568.43,4220.66 v5@5608.12,4260.35 ; C39.2@5463.62,4637.19 v4(5484.28,4616.53) C33.1@5676.62,4424.19 v4@5704.79,4396.02 ; v5@5608.17,4260.4 C23.2@5634.62,4286.85 C27.2@5662.62,4314.85 5705.44,4357.67 v4(5705.44,4396.02)
1V1_R: C57.1 C58.1 C59.1 C60.1 L2.1 R12.1 R16.1 R46.1 | length 1414.6
  Top Layer w12: 5737.5,5517.98 R46.1@5787.44,5517.98
  Top Layer w20: R12.1@4927.44,4974.68 v1(4927.44,5015.02)
  Top Layer w30: R16.1@5462.44,5124.68 v1(5462.44,5160.02) 5737.44,5435.02 5737.44,5700.02 5757.44,5720.02
  Bottom Layer w20: v1(4927.44,5015.02) 5087.44,5015.02 5197.44,5125.02 5447.44,5125.02 5462.44,5140.02 v1(5462.44,5160.02)
3V3: 3V3.1 C15.2 C16.1 C18.1 C21.1 C24.2 C25.2 C28.1 C29.2 C30.2 C34.1 C38.2 C40.2 C41.2 C43.2 LED1.1 LED2.1 LED3.1 LED4.1 LED7.1 LED9.1 pad.4@6691.42,5074.55 R14.2 R17.2 R18.2 R20.2 R21.1 R23.2 R25.2 R28.2 R45.1 R55.1 R56.1 R57.1 R59.1 R63.1 R65.1 R69.1 R71.1 R75.1 R77.1 R93.2 R94.2 RJ1.11 RJ2.11 RJ3.11 RJ4.11 U2.8 U3.11 U3.17 U3.21 U3.33 U3.41 U3.42 U3.59 U3.67 U3.82 U3.90 U3.102 U3.116 U3.128 | length 9774.3
  Top Layer w6: LED1.1@3577.28,5592.26 3550.2,5592.26 3541.81,5600.65 v1(3541.81,5625.73) 3541.81,5644.39 3549.69,5652.26 LED2.1@3577.28,5652.26 ; R65.1@3689.77,5542.26 3689.77,5573.69 3708.33,5592.25 v1(3741.81,5625.73) 3741.81,5719.3 R59.1@3764.77,5742.26 ; R63.1@3889.77,5542.26 3889.77,5573.69 3908.33,5592.25 v1(3941.81,5625.73) 3941.81,5719.3 R57.1@3964.77,5742.26 ; R75.1@4084.77,5542.26 4084.77,5568.69 4108.33,5592.25 v1(4141.81,5625.73) 4141.81,5719.3 R69.1@4164.77,5742.26 ; R77.1@4289.77,5542.26 4289.77,5573.69 4308.33,5592.25 v1(4341.81,5625.73) 4341.81,5719.3 R71.1@4364.77,5742.26 ; v1(4452.84,5625.72) 4452.84,5494.62 4717.44,5230.02 4917.44,5230.02 5050.4,5097.06 R56.1@5312.44,5097.06 R55.1@5357.44,5097.06 5375.74,5097.06 R17.2@5407.44,5065.36 5439.14,5097.06 R25.2@5512.44,5097.06 5512.44,5145.02 5532.44,5165.02 5627.44,5165.02 5647.44,5145.02 R23.2@5647.44,5097.06 5784.48,5097.06 5824.48,5137.06 R45.1@5824.48,5300.02 ; R18.2@6342.44,4747.06 v1(6342.44,4785.02) R20.2@6342.44,4817.98 ; C15.2@6342.44,5058.56 v1(6342.44,5025.02) R14.2@6342.44,4992.06 R28.2@6392.44,4992.06 R21.1@6442.44,4992.06
  Top Layer w7.9: U3.102@5098.07,4279.56 v4(5133.11,4314.56) ; U3.90@5109.28,4481.65 v4(5144.28,4446.65) ; U3.82@5198.38,4570.75 v4(5233.38,4535.75) ; U3.116@5253.99,4123.64 v4(5289.03,4158.64) ; U3.67@5365.36,4737.77 v4(5400.4,4702.77) ; v4(5422.67,4025) 5387.67,3990 5362.44,3964.81 5362.44,3895.02 5437.44,3820.02 5437.44,3650.02 5412.44,3625.02 5412.44,3545.02 5482.44,3475.02 5482.44,3317.44 RJ3.11@5542.48,3257.4 5604.86,3195.02 6120.1,3195.02 RJ4.11@6182.48,3257.4 ; v4(5485.44,4670.02) 5488.53,4670.02 U3.59@5522.9,4704.39 ; v4(5543.66,4136.37) U3.11@5578.66,4101.37 ; v4(5610.48,4203.19) U3.17@5645.48,4168.19 ; v4(5655.03,4247.74) U3.21@5689.99,4212.74 ; v4(5670.44,4485.02) 5682.26,4485.02 U3.42@5712.26,4515.03 ; v4(5692.44,4463.02) 5692.44,4473 U3.41@5723.37,4503.93 ; v4(5761.44,4392.02) 5789.69,4392.02 U3.33@5812.46,4414.83
  Top Layer w12: v1(6117.44,5025.02) U2.8@6206.42,5025.02 6277.44,5025.02 6310.98,5058.56 C15.2@6342.44,5058.56 6346.86,5062.98 R93.2@6392.44,5062.98 R94.2@6442.44,5062.98 6465.4,5062.98 6476.97,5074.55 pad.4@6691.42,5074.55
  Top Layer w30: v1(5407.44,5005.02) v1(5407.44,5025.02) R17.2@5407.44,5065.36
  Bottom Layer w6: v1(3541.81,5625.73) v1(3741.81,5625.73) v1(3941.81,5625.73) v1(4141.81,5625.73) v1(4341.81,5625.73) v1(4452.84,5625.72) ; RJ2.11@4262.48,3257.4 4324.86,3195.02 4840.1,3195.02 RJ1.11@4902.48,3257.4 ; v1(6342.44,4785.02) v1(6342.44,5025.02)
  Bottom Layer w8: RJ1.11@4902.48,3257.4 4964.86,3195.02 5482.44,3195.02 5542.48,3255.06 RJ3.11@5542.48,3257.4
  Bottom Layer w12: v1(5407.44,5025.02) v1(6117.44,5025.02)
  Bottom Layer w30: v1(5407.44,5025.02) v1(5407.44,5005.02) 5407.44,4963.04 5500,4870.49 5500,4731.02 5553,4678.02
3V3_R: C47.1 C48.1 C49.1 C50.1 L1.1 R13.1 R17.1 R37.1 R81.1 | length 2956.5
  Top Layer w12: 4692.44,5720.02 4672.44,5700.02 4672.44,5540.02 4694.48,5517.98 R37.1@4722.44,5517.98
  Top Layer w30: R81.1@3981.38,5055.7 3982.06,5055.02 v1(4057.44,5055.02) v1(4077.96,5055.02) v1(4332.96,5310.02) v1(4355.1,5310.02) v1(4377.44,5310.02) ; R13.1@4742.44,4974.68 4742.44,5045.02 ; v1(5397.44,5160.02) 5407.44,5160.02 ; R17.1@5407.44,5124.68 5407.44,5160.02 ; v1(5417.44,5160.02) 5407.44,5160.02 ; 4742.44,5045.02 v1(4732.44,5055.02) v1(4752.44,5055.02) 4742.44,5045.02
  Bottom Layer w30: v1(4057.44,5055.02) v1(4077.96,5055.02) v1(4732.44,5055.02) v1(4752.44,5055.02) 5072.44,5055.02 5177.44,5160.02 v1(5397.44,5160.02) v1(5417.44,5160.02) ; v1@4332.44,5310.02 v1(4355.1,5310.02) v1(4377.44,5310.02) 4702.44,5635.02 v1(4702.44,5717.05) v1(4702.44,5738.64) v1(4702.44,5760.02)
8213B_1V0: C3.2 C4.2 C5.2 C6.2 C7.2 C8.2 C75.2 R12.2 U1.6 U1.8 U1.11 U1.22 U1.34 U1.40 | length 1545.5
  Top Layer w10: C4.2@4712.62,4279.85 4752.44,4240.02 v1(4767.44,4240.02)
  Top Layer w12: C6.2@4730.77,4460.19 4755.44,4484.87 v1(4755.44,4490.02)
  Top Layer w15.75: v1(4545.44,4427.02) C3.2@4572.27,4400.19 ; v1(4667.44,4229.02) 4682.62,4244.19 C8.2@4682.62,4249.85
  Top Layer w19.68: C3.2@4572.27,4400.35 v1(4681.44,4509.52) 4730.77,4460.19 C6.2@4732.62,4460.19
  Top Layer w20: v1(4867.17,4875.61) C75.2@4867.17,4915.95 ; C75.2@4867.44,4917.46 4925.34,4917.46 R12.2@4927.44,4915.36
  Top Layer w21.26: C8.2@4682.62,4249.85 C4.2@4712.62,4279.85 C5.2@4744.97,4312.2 4798.9,4366.13 C7.2@4798.9,4380.02 ; C6.2@4732.62,4460.19 4798.9,4393.91 C7.2@4798.9,4380.02 ; v1(4828.45,4380.02) C7.2@4798.9,4380.02
  Bottom Layer w6: U1.8@4721.74,4277.6 4737.44,4261.9 4737.44,4257.92 4755.34,4240.02 v1(4767.44,4240.02) 4782.44,4255.02 4782.44,4266.74 4764.16,4285.02 4758.87,4285.02 U1.6@4744.01,4299.88
  Bottom Layer w7.9: v1(4545.44,4427.02) 4550.05,4427.02 U1.22@4571.44,4405.62 ; U1.11@4660.53,4255.33 cw(c4643.85,4238.65) 4667.44,4238.65 v1(4667.44,4229.02) ; U1.34@4732.88,4461.3 4755.44,4483.87 v1(4755.44,4490.02) ; U1.40@4799.69,4394.49 4804.05,4390.13 ccw(c4828.45,4414.53) v1(4828.45,4380.02)
  Bottom Layer w19.68: v1(4681.44,4509.52) 4681.94,4509.52 4802.44,4630.02 4802.44,4810.89 v1(4867.17,4875.61)
8213B_3V3: C9.2 C10.2 C11.2 C12.2 C13.2 C14.2 R1.2 R2.1 R3.2 R4.2 R10.2 R13.2 R95.2 U1.7 U1.14 U1.21 U1.28 U1.35 | length 1964.9
  Top Layer w6: R95.2@4517.44,4967.06 R1.2@4557.44,4967.06 4560.4,4967.06 4594.48,4932.98 R4.2@4597.44,4932.98 R3.2@4637.44,4932.98 R2.1@4677.44,4932.98 4724.82,4932.98 R13.2@4742.44,4915.36
  Top Layer w10: C13.2@4547.62,4295.19 4547.62,4294.85 v1(4582.44,4260.02)
  Top Layer w16: v1(4757.44,4265.02) 4757.62,4265.19 C10.2@4792.27,4265.19
  Top Layer w19.68: C14.2@4517.62,4445.19 v1(4502.44,4430.02) 4502.44,4340.37 C13.2@4547.62,4295.19 ; C14.2@4527.27,4454.85 v1(4597.44,4525.02) 4627.44,4555.02 4722.44,4555.02 ; C10.2@4792.27,4265.19 4854.93,4327.85 4854.93,4428.54 v1(4788.44,4495.02) 4728.44,4555.02 4722.44,4555.02 ; C9.2@4802.44,4917.46 4802.44,4635.02 4722.44,4555.02
  Top Layer w20: R13.2@4742.44,4915.36 4800.34,4915.36 C9.2@4802.44,4917.46
  Bottom Layer w6: v1(4788.44,4495.02) 4837.44,4544.02 4837.44,4555.02 4825.39,4567.07 R10.2@4824.49,4567.07
  Bottom Layer w7.87: v1(4502.44,4430.02) 4526.44,4406.02 4548.77,4406.02 U1.21@4560.31,4394.49
  Bottom Layer w7.9: v1(4582.44,4260.02) ccw(c4582.44,4298.55) 4609.69,4271.31 U1.14@4627.12,4288.74 ; v1(4597.44,4525.02) ccw(c4625.84,4525.02) 4605.76,4504.94 U1.28@4638.26,4472.44 ; U1.7@4732.88,4288.74 4756.6,4265.02 v1(4757.44,4265.02) ; U1.35@4744.01,4450.16 4788.44,4494.59 v1(4788.44,4495.02)
8213B_EN_SWR: R11.2 U1.15 | length 110.1
  Bottom Layer w6: R11.2@4519.49,4267.07 4532.44,4280.02 4596.13,4280.02 U1.15@4615.99,4299.88
8213B_SCK: R8.1 U1.32 | length 246.4
  Bottom Layer w6: U1.32@4710.6,4483.57 4724.44,4497.41 4724.44,4502.64 4872.44,4650.64 R8.1@4872.44,4662.98
8213B_SDA: R7.1 U1.31 | length 223.3
  Bottom Layer w6: U1.31@4699.47,4494.71 4832.44,4627.61 R7.1@4832.44,4662.98
$1N2704: C1.1 U1.29 X1.3 | length 327.8
  Bottom Layer w7.9: X1.3@4586.27,4717.3 4590.16,4717.3 4627.44,4680.02 4627.44,4505.53 U1.29@4649.4,4483.57
  Bottom Layer w8: C1.1@4527.05,4701.76 4570.73,4701.76 X1.3@4586.27,4717.3
$1N2705: C2.2 U1.30 X1.1 | length 248.6
  Bottom Layer w7.9: U1.30@4660.53,4494.71 4642.44,4512.8 4642.44,4625.02 4667.79,4650.37 X1.1@4672.9,4650.37
  Bottom Layer w8: X1.1@4672.9,4650.37 4681.36,4658.84 C2.2@4739.19,4658.84
$1N2729: R10.1 U1.33 | length 114
  Bottom Layer w6: U1.33@4721.74,4472.44 4736.44,4487.14 4736.44,4497.67 4753.79,4515.02 4772.44,4515.02 R10.1@4800.39,4542.97
$1N2756: R9.2 U1.5 | length 132.2
  Bottom Layer w6: U1.5@4755.14,4311.01 4817.44,4248.71 4817.44,4230.02 R9.2@4835.39,4212.07
$1N15351: LED1.2 R5.2 | length 61.4
  Top Layer w6: LED1.2@3510.28,5592.26 3520.4,5582.14 R5.2@3520.4,5535.02
$1N15422: LED2.2 R6.2 | length 62
  Top Layer w6: LED2.2@3510.28,5652.26 3520.4,5662.39 R6.2@3520.4,5710.02
$2N8722: R29.2 U3.50 | length 133
  Top Layer w7.9: U3.50@5623.17,4604.12 5674.1,4655.02 5703.57,4655.02 R29.2@5725.89,4677.34
$2N10627: R19.2 U3.13 | length 123.4
  Top Layer w6: U3.13@5600.9,4123.64 5634.52,4090.02 5652.44,4090.02 R19.2@5693.39,4049.07
$2N10705: R30.2 U3.51 | length 208.3
  Top Layer w6: U3.51@5612,4615.29 5671.76,4675.02 5692.44,4675.02 R30.2@5765.39,4747.97
$2N10706: R31.2 U3.52 | length 128.5
  Top Layer w6: U3.52@5600.9,4626.4 5664.56,4690.02 5678.57,4690.02 R31.2@5695.89,4707.34
$2N10709: R32.2 U3.55 | length 127
  Top Layer w6: U3.55@5567.49,4659.84 5632.94,4725.29 5632.94,4734.39 R32.2@5650.89,4752.34
$2N10710: R33.2 U3.56 | length 138.1
  Top Layer w7.9: U3.56@5556.39,4670.94 5602.94,4717.5 5602.94,4764.39 R33.2@5620.89,4782.34
$2N10719: R14.1 U2.7 | length 143.1
  Top Layer w6: U2.7@6206.42,4975.02 6277.44,4975.02 6294.48,4957.98 R14.1@6342.44,4957.98
$2N10720: R15.2 U2.3 | length 263.8
  Top Layer w6: R15.2@5819.49,4742.07 5847.44,4770.02 5847.44,4905.02 5867.44,4925.02 U2.3@5928.46,4925.02
$3N1473: R50.2 USB1.B5 | length 588.3
  Top Layer w6: USB1.B5@3354.81,3411.14 3354.81,3376.57 3406.36,3325.02 3482.44,3325.02 3512.44,3355.02 3512.44,3550.02 3417.44,3645.02 R50.2@3417.44,3677.98
$3N1474: R49.2 USB1.A5 | length 729.3
  Top Layer w6: USB1.A5@3236.71,3411.14 3236.71,3376.57 3253.26,3360.02 3347.44,3360.02 3397.44,3310.02 3492.44,3310.02 3527.44,3345.02 3527.44,3560.02 3457.44,3630.02 R49.2@3457.44,3677.98
$3N3557: R43.1 U4.8 | length 106.6
  Top Layer w6: R43.1@4839.48,5295.02 4839.48,5327.06 4877.44,5365.02 U4.8@4898.29,5365.02
$3N4125: C46.2 U4.1 | length 58.1
  Top Layer w19.7: v1(5116.44,5336.02) 5116.59,5336.17 U4.1@5116.59,5365.02
  Bottom Layer w19.7: v1(5116.44,5336.02) C46.2@5116.44,5365.02
$3N4144: C46.1 L1.2 U4.3 | length 147.4
  Top Layer w6: U4.3@5116.59,5465.02 v1(5172.44,5465.02)
  Bottom Layer w19.7: C46.1@5116.44,5420.14 5116.44,5449.02 5132.44,5465.02 v1(5172.44,5465.02)
$3N4802: C44.2 C45.2 R35.2 R36.1 U4.2 | length 546.1
  Top Layer w6: R36.1@4759.48,5300.02 4789.48,5270.02 4867.44,5270.02 v1(4892.44,5295.02)
  Bottom Layer w6: v1(4892.44,5295.02) 5152.44,5295.02 5177.44,5320.02 v1(5177.44,5415.02)
$3N5896: C52.2 R40.2 U4.6 | length 131.2
  Top Layer w6: R40.2@4804.48,5425.02 4804.48,5460.6 C52.2@4808.9,5465.02 U4.6@4898.29,5465.02
$3N5930: C51.2 R40.1 | length 48.6
  Top Layer w6: C51.2@4722.44,5423.56 4723.9,5425.02 R40.1@4770.4,5425.02
$3N5978: R38.1 R41.2 U4.5 | length 133.8
  Top Layer w6: R38.1@4804.48,5555.02 R41.2@4804.48,5515.02 U4.5@4898.29,5515.02
$3N6342: R36.2 R39.2 | length 44.2
  Top Layer w6: R39.2@4722.44,5342.98 4722.44,5340.02 4725.4,5337.06 R36.2@4725.4,5300.02
$3N6380: R37.2 R38.2 | length 49.2
  Top Layer w6: R37.2@4722.44,5552.06 4725.4,5555.02 R38.2@4770.4,5555.02
$3N6455: C53.2 R39.1 R42.2 U4.7 | length 191.6
  Top Layer w6: R39.1@4722.44,5377.06 R42.2@4767.44,5377.06 4803.02,5377.06 C53.2@4807.44,5381.48 4843.9,5381.48 4877.44,5415.02 U4.7@4898.29,5415.02
$3N9049: C56.2 U5.1 | length 58.1
  Top Layer w19.7: v1(6181.44,5336.02) 6181.59,5336.17 U5.1@6181.59,5365.02
  Bottom Layer w19.7: v1(6181.44,5336.02) C56.2@6181.44,5365.02
$3N9050: C56.1 L2.2 U5.3 | length 147.4
  Top Layer w6: U5.3@6181.59,5465.02 v1(6237.44,5465.02)
  Bottom Layer w19.7: C56.1@6181.44,5420.14 6181.44,5449.02 6197.44,5465.02 v1(6237.44,5465.02)
$3N9054: R54.1 U5.8 | length 76.6
  Top Layer w6: R54.1@5904.48,5290.02 5904.48,5327.06 5932.44,5355.02
$3N9055: C61.2 R51.1 | length 48.6
  Top Layer w6: C61.2@5787.44,5423.56 5788.9,5425.02 R51.1@5835.4,5425.02
$3N9056: R47.1 R52.2 U5.5 | length 132.8
  Top Layer w6: R47.1@5869.48,5555.02 R52.2@5869.48,5515.02 U5.5@5962.3,5515.02
$3N9057: C54.2 C55.2 R44.2 U5.2
$3N9058: R45.2 R48.2 | length 44.2
  Top Layer w6: R48.2@5787.44,5342.98 5787.44,5302.98 R45.2@5790.4,5300.02
$3N9059: R46.2 R47.2 | length 49.2
  Top Layer w6: R46.2@5787.44,5552.06 5832.44,5552.06 R47.2@5835.4,5555.02
$3N9061: C62.2 R51.2 U5.6 | length 130.2
  Top Layer w6: R51.2@5869.48,5425.02 5869.48,5460.6 C62.2@5873.9,5465.02 U5.6@5962.3,5465.02
$3N9063: C63.2 R48.1 R53.2 U5.7 | length 156.6
  Top Layer w6: R48.1@5787.44,5377.06 R53.2@5832.44,5377.06 5868.02,5377.06 C63.2@5872.44,5381.48 5908.9,5381.48 5932.44,5405.02
$4N4589: C65.2 RJ2.P1 | length 114.6
  Bottom Layer w10: C65.2@4263.98,3700.02 4263.98,3721.52 4292.48,3750.02 4292.48,3802.27 RJ2.P1@4292.85,3802.64
$4N4590: C64.2 RJ1.P1 | length 114.6
  Bottom Layer w10: C64.2@4903.98,3700.02 4903.98,3721.52 4932.85,3750.39 RJ1.P1@4932.85,3802.64
$4N4591: C66.2 RJ3.P1 | length 112.5
  Bottom Layer w10: C66.2@5548.98,3700.02 5548.98,3721.52 5572.85,3745.39 RJ3.P1@5572.85,3802.64
$4N4592: C67.2 RJ4.P1 | length 115.2
  Bottom Layer w10: C67.2@6182.48,3700.02 6182.48,3720.02 6212.85,3750.39 RJ4.P1@6212.85,3802.64
$4N30026: R71.2 R72.2 R74.1 R78.1 | length 203.5
  Top Layer w6: R78.1@4318.85,5702.26 R72.2@4318.85,5742.26 4318.85,5759.3 4329.57,5770.02 4389.05,5770.02 4398.85,5760.22 R71.2@4398.85,5742.26 R74.1@4398.85,5702.26
$4N30032: LED10.2 R78.2 RJ4.14 | length 6200.1
  Top Layer w6: R78.2@4284.77,5702.26 4284.77,5672.96 LED10.2@4306.91,5650.82 ; v1(4286.81,5492.26) 4286.81,5494.26 4261.81,5519.26 4261.81,5605.73 LED10.2@4306.91,5650.82 ; LED10.2@4307.97,5649.76 LED10.2@4306.91,5650.82 ; LED10.2@4308.31,5652.26 LED10.2@4306.91,5650.82
  Bottom Layer w6: v1(4286.81,5492.26) 4104.57,5310.02 3557.44,5310.02 3347.44,5100.02 3347.44,4301.08 3492.44,4156.08 3492.44,3855.02 3647.44,3700.02 3867.44,3700.02 4222.44,3345.02 6172.44,3345.02 6232.44,3285.02 6232.44,3230.02 6267.44,3195.02 6640.1,3195.02 RJ4.14@6702.48,3257.4
$4N30868: R69.2 R70.2 R73.1 R76.1 | length 202.9
  Top Layer w6: R76.1@4118.85,5702.26 R70.2@4118.85,5742.26 4118.85,5759.3 4129.57,5770.02 4188.05,5770.02 4198.85,5759.22 R69.2@4198.85,5742.26 R73.1@4198.85,5702.26
$4N30874: LED8.1 R76.2 RJ3.14 | length 5424.1
  Top Layer w6: v1(4056.81,5492.26) 4056.81,5600.73 LED8.1@4108.31,5652.26 4084.77,5675.84 R76.2@4084.77,5702.26
  Bottom Layer w6: v1(4056.81,5492.26) 3919.57,5355.02 3542.44,5355.02 3302.44,5115.02 3302.44,4285.02 3447.44,4140.02 3447.44,3840.02 3632.44,3655.02 3852.44,3655.02 4207.44,3300.02 5572.44,3300.02 5592.44,3280.02 5592.44,3230.02 5627.44,3195.02 6000.1,3195.02 RJ3.14@6062.48,3257.4
$4N31815: R57.2 R58.2 R61.1 R64.1 | length 208.4
  Top Layer w6: R64.1@3918.85,5702.26 R58.2@3918.85,5742.26 3918.85,5764.3 3924.57,5770.02 3992.44,5770.02 3998.85,5763.61 R57.2@3998.85,5742.26 R61.1@3998.85,5702.26
$4N31821: LED6.2 R64.2 RJ1.14 | length 4745.9
  Top Layer w6: v1(3737.44,3595.02) 3972.44,3595.02 4222.44,3345.02 4877.44,3345.02 4952.44,3270.02 4952.44,3210.02 4967.44,3195.02 5360.1,3195.02 RJ1.14@5422.48,3257.4 ; R64.2@3884.77,5702.26 3884.77,5680.63 3908.35,5657.06 LED6.2@3908.31,5652.26 3866.81,5610.73 3866.81,5522.26 v1(3896.81,5492.26)
  Bottom Layer w6: v1(3737.44,3595.02) 3632.44,3595.02 3402.44,3825.02 3402.44,4125.02 3257.44,4270.02 3257.44,5130.02 3527.44,5400.02 3804.57,5400.02 v1(3896.81,5492.26)
$4N32799: R59.2 R60.2 R62.1 R66.1 | length 203.5
  Top Layer w6: R66.1@3718.85,5702.26 R60.2@3718.85,5742.26 3718.85,5759.3 3729.57,5770.02 3789.05,5770.02 3798.85,5760.22 R59.2@3798.85,5742.26 R62.1@3798.85,5702.26
$4N32805: LED5.2 R66.2 RJ2.14 | length 3973.9
  Top Layer w6: v1(3667.44,5495.02) 3667.44,5611.36 LED5.2@3708.31,5652.26 3708.35,5657.06 3684.77,5680.63 R66.2@3684.77,5702.26 ; v1(3717.44,3535.02) 3972.44,3535.02 4207.44,3300.02 4289.44,3300.02 4312.44,3277.02 4312.44,3210.02 4327.44,3195.02 4720.1,3195.02 RJ2.14@4782.48,3257.4
  Bottom Layer w6: v1(3667.44,5495.02) 3617.44,5445.02 3512.44,5445.02 3212.44,5145.02 3212.44,4255.02 3357.44,4110.02 3357.44,3810.02 3632.44,3535.02 v1(3717.44,3535.02)
$4N34293: LED4.2 R68.1 RJ2.12 | length 3452.9
  Top Layer w6: v1(3737.44,3555.02) 3972.44,3555.02 4212.44,3315.02 4304.86,3315.02 RJ2.12@4362.48,3257.4 ; LED4.2@3775.31,5592.26 3798.85,5568.69 R68.1@3798.85,5542.26 R68.1@3801.81,5539.3 ; v1(3801.81,5472.26) 3803.85,5474.3 R68.1@3803.85,5542.26
  Bottom Layer w6: v1(3737.44,3555.02) 3632.44,3555.02 3372.44,3815.02 3372.44,4115.02 3227.44,4260.02 3227.44,5140.02 3517.44,5430.02 3759.57,5430.02 v1(3801.81,5472.26)
$4N34487: LED3.2 R67.1 RJ1.12 | length 4164.4
  Top Layer w6: v1(3717.44,3615.02) 3972.44,3615.02 4227.44,3360.02 4899.86,3360.02 RJ1.12@5002.48,3257.4 ; LED3.2@3975.31,5592.26 3998.85,5568.69 R67.1@3998.85,5542.26 3998.85,5494.3 v1(3996.81,5492.26)
  Bottom Layer w6: v1(3717.44,3615.02) 3632.44,3615.02 3417.44,3830.02 3417.44,4130.02 3272.44,4275.02 3272.44,5125.02 3532.44,5385.02 3889.57,5385.02 v1(3996.81,5492.26)
$4N34681: LED7.2 R79.1 RJ3.12 | length 4908.5
  Top Layer w6: LED7.2@4175.31,5592.26 4198.85,5568.69 R79.1@4198.85,5542.26 4198.85,5474.3 v1(4196.81,5472.26)
  Bottom Layer w6: v1(4196.81,5472.26) 4064.57,5340.02 3547.44,5340.02 3317.44,5110.02 3317.44,4290.02 3462.44,4145.02 3462.44,3845.02 3637.44,3670.02 3857.44,3670.02 4212.44,3315.02 5584.86,3315.02 RJ3.12@5642.48,3257.4
$4N34875: LED9.2 R80.1 RJ4.12 | length 5629.2
  Top Layer w6: LED9.2@4375.31,5592.26 4398.85,5568.69 R80.1@4398.85,5542.26 4396.81,5540.22 v1(4396.81,5492.26)
  Bottom Layer w6: v1(4396.81,5492.26) 4199.57,5295.02 3562.44,5295.02 3362.44,5095.02 3362.44,4310.02 3507.44,4165.02 3507.44,3860.02 3652.44,3715.02 3872.44,3715.02 4227.44,3360.02 6179.86,3360.02 RJ4.12@6282.48,3257.4
$5N1285: CN1.3 H2.3 | length 1195
  Top Layer w8: H2.3@3127.44,5035.02 3377.44,5035.02 3457.44,4955.02 3457.44,4590.02 3543.44,4504.02 3690.81,4504.02 3730.81,4464.02 3786.44,4464.02 3811.61,4489.19 CN1.3@3811.61,4539.24
$5N1286: CN1.7 H2.7 | length 996.1
  Top Layer w8: H2.7@3127.44,4635.02 3232.44,4635.02 3419.44,4448.02 3667.62,4448.02 3707.62,4408.02 3870.44,4408.02 3937.58,4475.16 CN1.7@3937.58,4539.24
$5N1288: CN1.8 H2.8 R90.1 | length 999.8
  Top Layer w6: H2.8@3127.44,4535.02 R90.1@3227.4,4535.02
  Top Layer w8: R90.1@3227.4,4535.02 3287.44,4535.02 3388.44,4434.02 3661.82,4434.02 3701.82,4394.02 3891.44,4394.02 3969.08,4471.66 CN1.8@3969.08,4539.24
$5N1289: CN1.2 H2.2 R82.1 | length 1242.3
  Top Layer w12: H2.2@3127.44,5135.02 R82.1@3227.4,5135.02 ; R82.1@3227.44,5135.06 3412.4,5135.06 3527.44,5020.02 3527.44,4565.02 3572.44,4520.02 3697.44,4520.02 3737.44,4480.02 3767.44,4480.02 3780.12,4492.7 CN1.2@3780.12,4539.24